# Altium PCB V-by-One.pcbdoc (part 2 of 2)
Units mil, origin at the board's own origin, x right, y up, seen from the top; angles counter-clockwise.
Board outline 3962.76 x 3236.76 mil, 2 copper layers (Top Layer, Bottom Layer); 214 components, 135 nets, 733 pads, 287 vias.
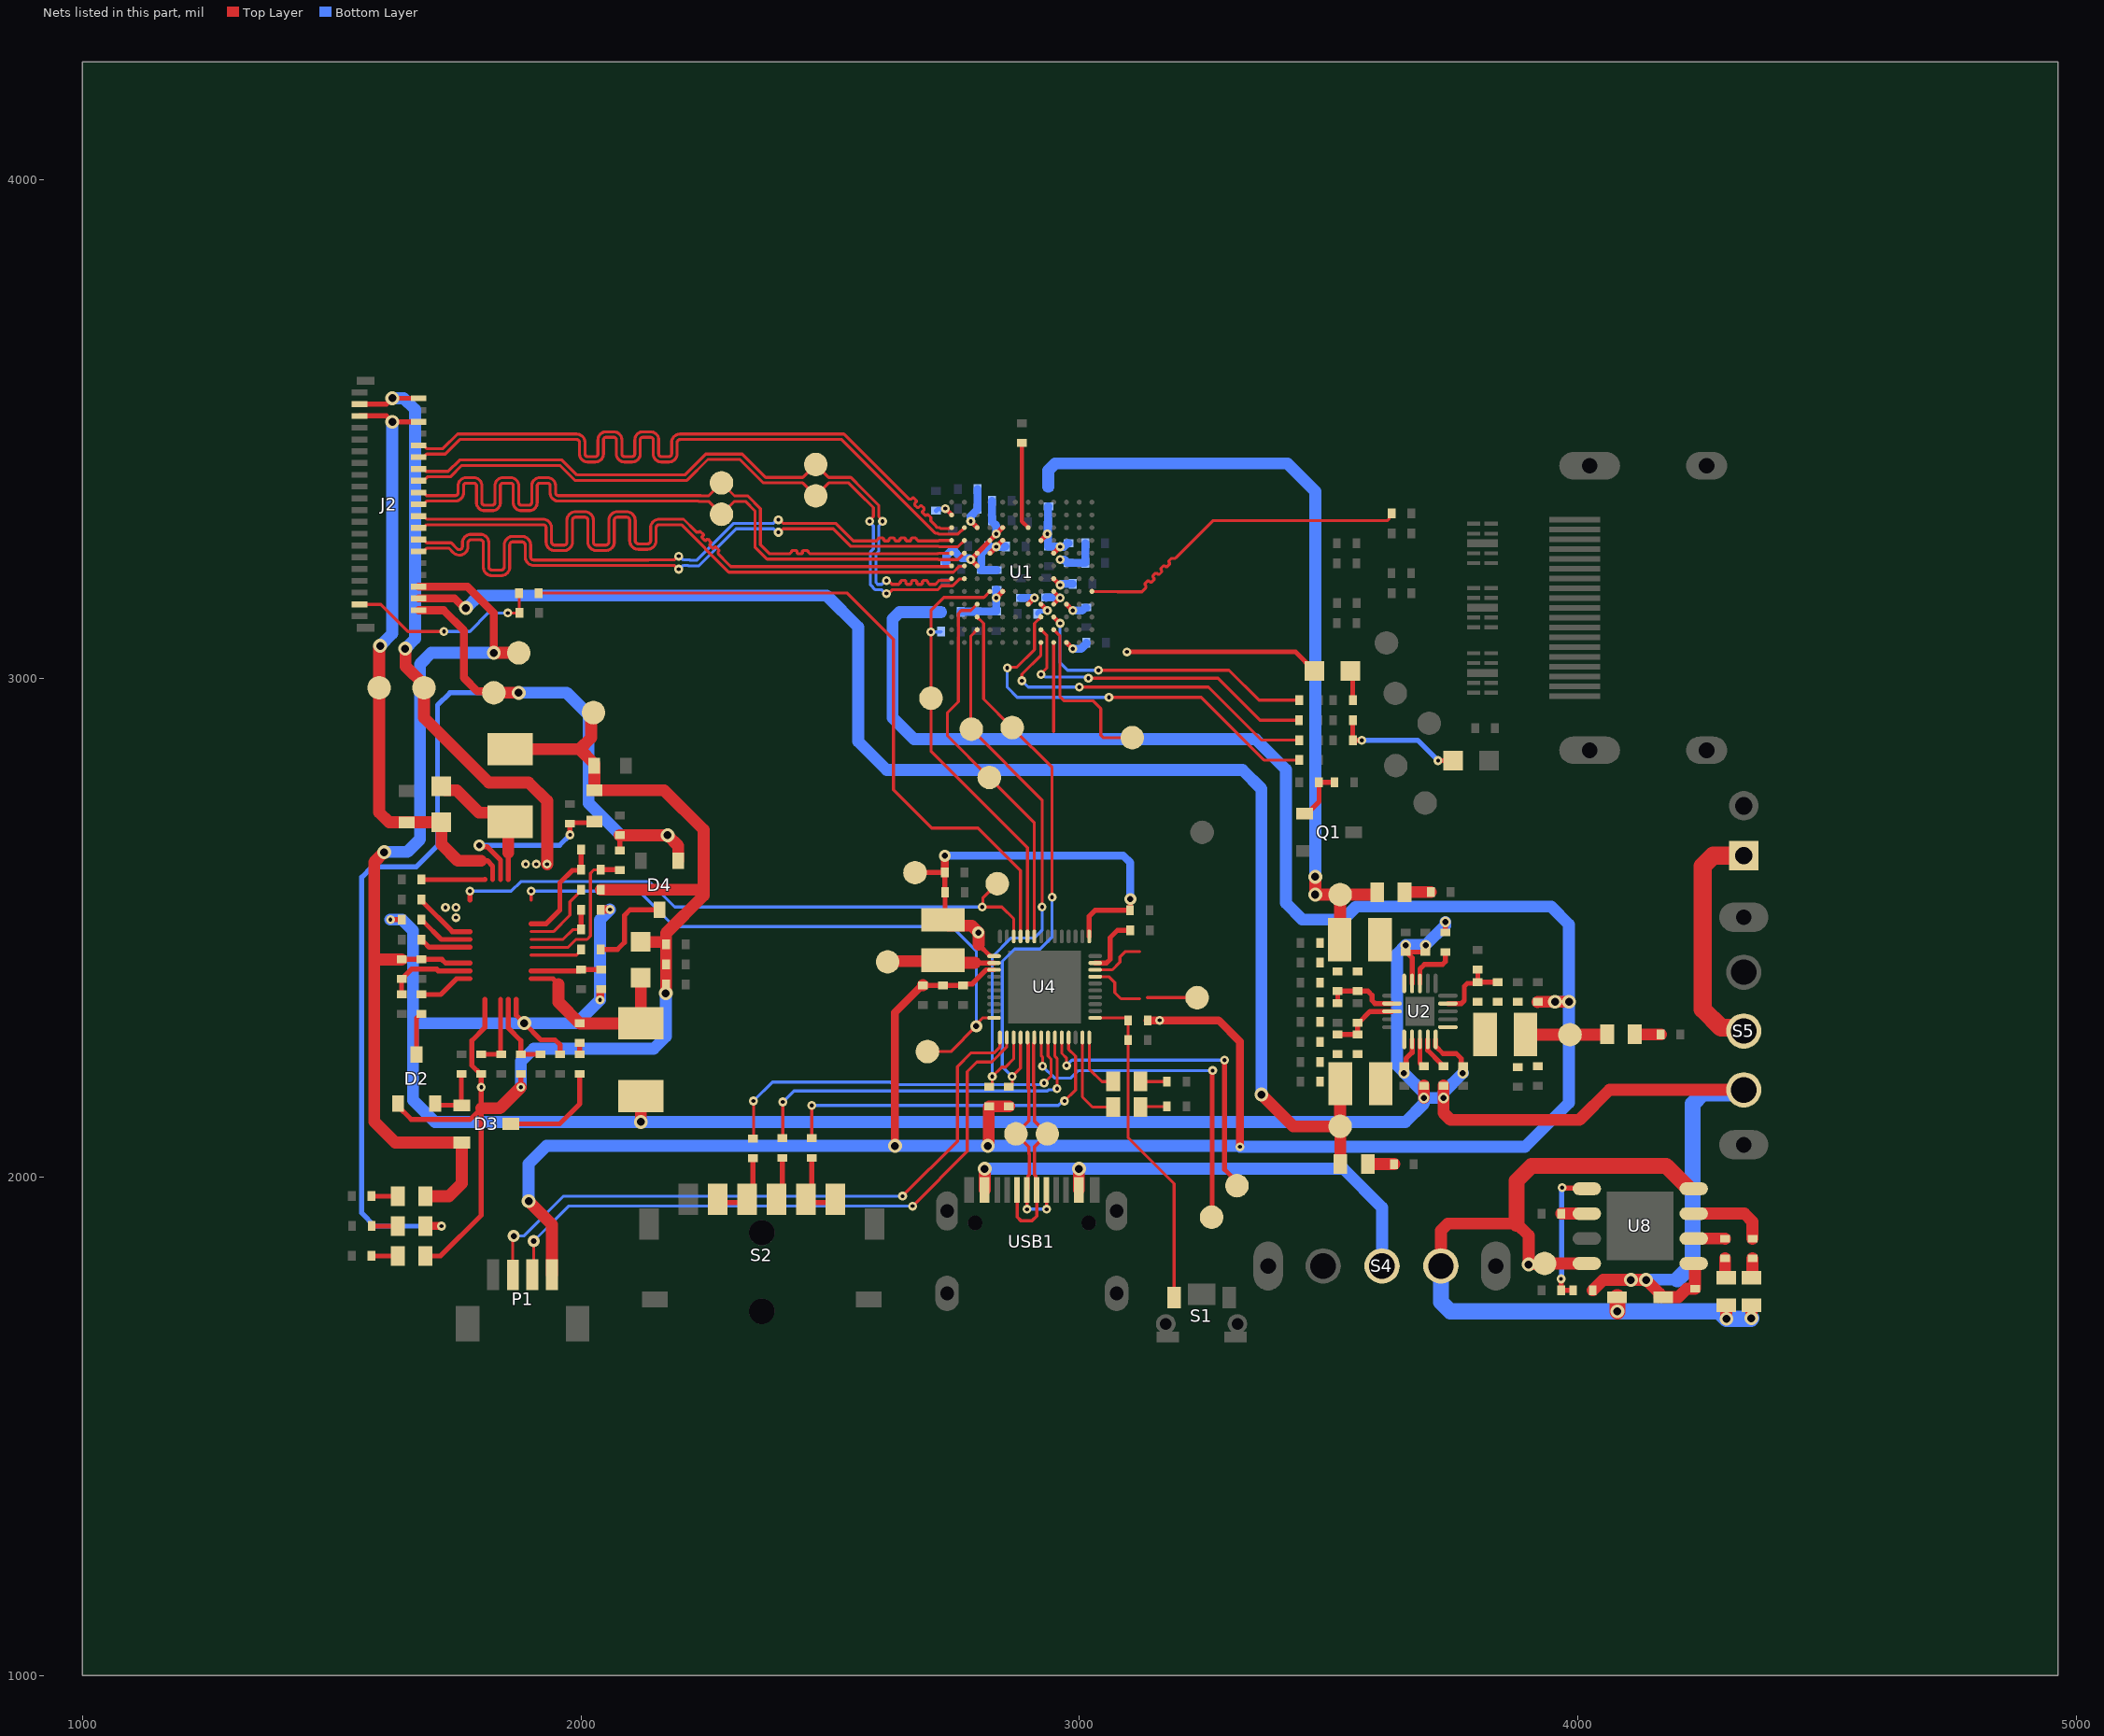
[diagram p2: the nets of this part, all layers, seen from the top]

## Via types
v1: diameter 18, hole 8, Top Layer to Bottom Layer, tented both sides, 186 vias
v2: diameter 28, hole 16, Top Layer to Bottom Layer, tented both sides, 33 vias
v3: diameter 22, hole 12, Top Layer to Bottom Layer, tented both sides, 29 vias
v4: diameter 19.68, hole 7.87, Top Layer to Bottom Layer, tented both sides, 26 vias
v5: diameter 24, hole 12, Top Layer to Bottom Layer, tented both sides, 12 vias
v6: diameter 20, hole 12, Top Layer to Bottom Layer, tented both sides, 1 vias

## Nets (pads, with @x,y where several pads share a name; then routed paths per layer and width w, separated by ;. In a path a pad name is that pad's centre, name@x,y a point inside that pad or via, vN(x,y) a via of type N, cw(c..) or ccw(c..) an arc to the next point about the centre after c; other vN are vias at no path point) (continued)
HR_D2_P: R44.1 U1.H12 | length 701.7
  Top Layer w5.97: U1.H12@3025,3174.61 3075.45,3174.61 3076.37,3173.69 3125,3173.69 3130.84,3179.54 3132.95,3181.65 3132.95,3186.59 3131.8,3187.74 3131.8,3190.84 3136.46,3195.5 3139.56,3195.5 3141.63,3193.43 3144.73,3193.43 3149.39,3198.08 3149.39,3201.19 3147.32,3203.26 3147.32,3206.36 3151.97,3211.01 3155.07,3211.01 3157.14,3208.94 3160.25,3208.94 3164.9,3213.6 3164.9,3216.7 3163.53,3218.07 3163.53,3221.17 3168.18,3225.83 3171.29,3225.83 3172.66,3224.46 3175.76,3224.46 3180.41,3229.11 3180.41,3232.21 3179.49,3233.14 3179.49,3236.24 3184.15,3240.89 3187.25,3240.89 3192.2,3240.89 3194.41,3243.1 3268.17,3316.86 3617.8,3316.86 3621.29,3320.36 3621.29,3326.49 R44.1@3626.18,3331.38
LCD_1V8: C2.2 C62.2 C63.2 C64.2 C65.2 D9.1 J2.36 L2.2 R6.1 TP2.1 | length 2963.4
  Top Layer w16: J2.36@1674.1,3160.47 1746.66,3160.47 1765.75,3141.38 v2(1769,3141.38)
  Top Layer w24: v2(3365,2165.38) 3429,2101.38 TP2.1@3523,2101.38 ; L2.2@3523.19,2186.92 3523.09,2186.82 3523.09,2101.47 TP2.1@3523,2101.38 ; D9.1@3523.44,2025.88 3523.22,2026.1 3523.22,2101.16 TP2.1@3523,2101.38
  Bottom Layer w24: v2(1769,3141.38) 1770.08,3141.38 1795.08,3166.38 2493,3166.38 2556,3103.38 2556,2873.38 2613,2816.38 3327,2816.38 3365,2778.38 3365,2393.38 v2(3365,2165.38)
LCD_BL+: C19.2 D5.2 J2.5 J2.6 TP8.1 | length 1241.7
  Top Layer w10: J2.5@1555.89,3526.7 1609.52,3526.7 v2(1621.42,3514.8) J2.6@1674.13,3514.8 ; 1799,2634.38 1812,2634.38 1822.76,2623.62 1822.76,2596.53
  Top Layer w24: v2(1597,3065.38) 1597,3064.3 1595,3062.3 1595,2731.38 1615,2711.38 C19.2@1650,2711.38 D5.2@1720,2711.38 1720,2667.38 1753,2634.38 1799,2634.38
  Bottom Layer w24: v2@1597.77,3066.14 1621.42,3089.8 v2(1621.42,3514.8)
LCD_BL-: J2.2 J2.3 TP7.1 | length 1263.4
  Top Layer w10: J2.3@1555.83,3550.32 1609.55,3550.32 v2(1621.41,3562.18) J2.2@1674.21,3562.18
  Top Layer w24: v2(1647.21,3059.67) 1647.97,3058.9 1647.97,3024.69 1685,2987.67 1685,2921.38 1815,2791.38 1895,2791.38 1932,2754.38 v1(1932,2627.38)
  Bottom Layer w24: v2(1621.41,3562.18) 1644.2,3562.18 1667,3539.38 1667,3079.46 v2(1647.21,3059.67)
  other v1: 1749,2520.38 1728,2540.38 1749,2540.38 1889,2627.38 1910,2627.38
LCD_EN: TP10.1 U4.10 | length 1276
  Top Layer w6: 1899.53,2555.2 1900,2555.67 v1(1900,2573.38) ; TP10.1@2695,2251.38 2742,2251.38 v5(2793,2302.38) 2793,2306.21 2805.84,2319.05 U4.10@2828.62,2319.06
  Bottom Layer w6: v1(1900,2573.38) 2116,2573.38 2187,2502.38 2744,2502.38 2793,2453.38 v5(2793,2302.38)
LCD_PWM: TP9.1 U4.46 | length 1243
  Top Layer w6: TP9.1@2835,2588.38 2806,2559.38 2806,2542.38 v1(2805,2541.38) 2844.48,2541.38 2867.99,2517.86 U4.46@2867.99,2482.44
  Top Layer w10: v1(1777,2573.38) 1777.24,2573.14 1777.24,2555.44 1777.48,2555.2
  Bottom Layer w6: v1(1777,2573.38) 1860,2573.38 1879,2592.38 2137,2592.38 2188,2541.38 v1(2805,2541.38)
LCD_RST: R9.2 U4.45 | length 1506.2
  Top Layer w6: R9.2@1915.23,3171.38 2325,3171.38 2534,3171.38 2627,3078.38 2627,2869.38 2627,2776.38 2703.45,2699.92 2796.45,2699.92 2881.77,2614.61 U4.45@2881.77,2482.44
LCD_VSN: C11.2 D4.1 D12.2 J2.38 R16.1 TP6.1 | length 2543.6
  Top Layer w10: R16.1@2077.63,2654.89 C11.2@2077.63,2685.52
  Top Layer w16: J2.38@1674.1,3136.83 1724.55,3136.83 1765,3096.38 1765,3001.38 1792.33,2974.05 1822.33,2974.05 TP6.1@1825,2971.38 ; D12.2@1687.56,1901.38 v1(1720,1901.38)
  Top Layer w24: TP6.1@1825,2971.38 v2(1875,2971.38) ; C11.2@2077.63,2685.52 v2(2173.86,2685.52) 2195.04,2664.34 D4.1@2195.04,2634.41
  Bottom Layer w10: v1(1720,1901.38) 1586,1901.38 1560,1927.38 1560,2601.38 1581,2622.38 1670,2622.38 1712,2664.38 1712,2946.38 1737,2971.38 v2(1875,2971.38)
  Bottom Layer w24: v2(1875,2971.38) 1971,2971.38 2015,2927.38 2015,2750.12 2079.61,2685.51 v2(2173.86,2685.52)
LCD_VSP: C14.2 D3.2 D11.1 J2.34 R18.1 TP5.1 | length 1999.2
  Top Layer w10: R18.1@1640,2436.38 C14.2@1680,2436.38 1720.77,2436.38 1727.93,2429.21 1777.48,2429.21
  Top Layer w16: J2.34@1674.09,3184.07 1772.31,3184.07 1825,3131.38 v2(1825,3051.38)
  Top Layer w24: v2(1605,2651.38) 1585,2631.38 1585,2431.38 ; R18.1@1640,2436.38 1590,2436.38 1585,2431.38 ; D11.1@1687.56,1961.38 1735,1961.38 1760.79,1987.16 D3.2@1760.78,2068.98 1627.4,2068.98 1585,2111.38 1585,2431.38 ; v2(1825,3051.38) TP5.1@1875,3051.38
  Bottom Layer w24: v2(1605,2651.38) 1605.77,2652.14 1651.77,2652.14 1677,2677.38 1677,3028.8 1699.57,3051.38 v2(1825,3051.38)
LED1: D14.1 U4.24 | length 121.3
  Top Layer w6: U4.24@3019.56,2279.69 3019.57,2216.81 3045,2191.38 D14.1@3067.44,2191.38
LED2: D15.1 U4.23 | length 189.2
  Top Layer w6: U4.23@3005.78,2279.69 3005.79,2160.59 3026.19,2140.19 D15.1@3067.44,2140.19
MCU_SWCLK: P1.3 U4.11 | length 1317.3
  Top Layer w6: P1.3@1863.04,1803.8 v5@1863.05,1881.38 ; v1(2645,1961.38) 2755,2071.38 2755,2221.38 2782.72,2249.09 2829.28,2249.09 2840.43,2260.25 U4.11@2840.43,2279.69
  Bottom Layer w6: v5(1865,1881.38) 1885,1881.38 1965,1961.38 v1(2645,1961.38)
MCU_SWDIO: P1.2 U4.12 | length 1291.9
  Top Layer w6: P1.2@1902.33,1803.86 1905,1806.52 v5(1905,1871.38) ; v1(2665,1941.38) 2775,2051.38 2775,2211.38 2794,2230.38 2824,2230.38 2853.85,2260.23 2853.85,2279.33 U4.12@2854.21,2279.69
  Bottom Layer w6: v5(1905,1871.38) 1975,1941.38 v1(2665,1941.38)
MIPI_CLK_N: J2.18 TP28.1 U1.E1 | length 1437.8
  Top Layer w5.97: J2.18@1674.09,3373.05 1683.94,3373.05 1690.26,3366.73 1738.87,3366.73 1747.34,3366.73 ccw(c1747.34,3372.7) 1753.31,3372.7 1753.31,3386.66 cw(c1769.47,3386.66) 1769.47,3402.82 1785.05,3402.82 cw(c1785.05,3386.66) 1801.22,3386.66 1801.22,3352.86 ccw(c1806.41,3352.86) 1806.41,3347.67 1821.99,3347.67 ccw(c1821.99,3352.86) 1827.19,3352.86 1827.19,3386.66 cw(c1843.35,3386.66) 1843.35,3402.82 1858.93,3402.82 cw(c1858.93,3386.66) 1875.1,3386.66 1875.1,3352.86 ccw(c1880.29,3352.86) 1880.29,3347.67 1895.87,3347.67 ccw(c1895.87,3352.86) 1901.07,3352.86 1901.07,3386.66 cw(c1917.23,3386.66) 1917.23,3402.82 1932.81,3402.82 cw(c1932.81,3386.66) 1948.98,3386.66 1948.98,3372.7 ccw(c1954.95,3372.7) 1954.95,3366.73 1981.44,3366.73 2240.03,3366.73 2240.39,3366.36 2255.85,3366.36 TP28.1@2281.86,3392.38 2307.88,3366.36 2334.41,3366.36 2359.84,3340.94 2359.84,3268.38 2377.75,3250.47 2415.87,3250.47 2418.85,3250.47 2422.35,3253.96 2422.35,3255.37 2423.45,3256.47 2432.22,3256.47 2433.32,3255.37 2433.32,3251.56 2434.42,3250.47 2443.19,3250.47 2444.29,3251.56 2444.29,3255.37 2445.39,3256.47 2454.16,3256.47 2455.26,3255.37 2455.26,3253.96 2458.76,3250.47 2481.53,3250.47 2716.02,3250.47 2716.93,3251.38 U1.E1@2743.5,3251.38
MIPI_CLK_P: J2.20 TP29.1 U1.E2 | length 1438.4
  Top Layer w5.97: J2.20@1687.08,3352.54 1690.29,3355.76 1738.87,3355.76 1747.34,3355.76 ccw(c1747.34,3372.7) 1764.28,3372.7 1764.28,3386.66 cw(c1769.47,3386.66) 1769.47,3391.85 1785.05,3391.85 cw(c1785.05,3386.66) 1790.25,3386.66 1790.25,3352.86 ccw(c1806.41,3352.86) 1806.41,3336.7 1821.99,3336.7 ccw(c1821.99,3352.86) 1838.16,3352.86 1838.16,3386.66 cw(c1843.35,3386.66) 1843.35,3391.85 1858.93,3391.85 cw(c1858.93,3386.66) 1864.13,3386.66 1864.13,3352.86 ccw(c1880.29,3352.86) 1880.29,3336.7 1895.87,3336.7 ccw(c1895.87,3352.86) 1912.04,3352.86 1912.04,3386.66 cw(c1917.23,3386.66) 1917.23,3391.85 1932.81,3391.85 cw(c1932.81,3386.66) 1938.01,3386.66 1938.01,3372.7 ccw(c1954.95,3372.7) 1954.95,3355.76 1981.44,3355.76 2235.49,3355.76 2235.85,3355.39 2255.85,3355.39 TP29.1@2281.86,3329.38 2307.88,3355.39 2329.87,3355.39 2348.87,3336.39 2348.87,3263.83 2373.2,3239.49 2716.02,3239.49 2716.93,3238.58 2756.3,3238.58 U1.E2@2769.09,3251.38
MIPI_D0_N: J2.14 TP30.1 U1.G1 | length 1388.8
  Top Layer w5.97: J2.14@1674.19,3420.33 1684.04,3420.33 1688.81,3415.55 1733.53,3415.55 1756.35,3438.38 1962,3438.38 1992,3408.38 2208,3408.38 2249.97,3450.35 2323.54,3450.35 2370.53,3403.36 2444.85,3403.36 TP30.1@2470.86,3429.38 2496.88,3403.36 2541.39,3403.36 2564.62,3380.14 2597.35,3347.41 2597.35,3324.89 2604.87,3317.38 v1(2604.86,3315.38) ; v1(2613,3196.38) 2616.26,3196.38 2623.77,3188.86 2629.38,3188.86 2634.38,3188.87 2637.37,3188.87 2640.86,3192.37 2640.86,3194.89 2642.51,3196.54 2650.19,3196.54 2651.83,3194.89 2651.83,3190.51 2653.48,3188.86 2661.16,3188.86 2662.8,3190.51 2662.8,3194.91 2664.45,3196.56 2672.13,3196.56 2673.77,3194.91 2673.77,3190.51 2675.42,3188.86 2683.1,3188.86 2684.74,3190.51 2684.74,3194.93 2686.39,3196.58 2694.07,3196.58 2695.71,3194.93 2695.71,3192.42 2699.21,3188.93 2710.87,3188.94 2715.87,3193.93 2718.91,3196.98 2739.24,3196.98 2742.46,3200.2 U1.G1@2743.5,3200.2
  Bottom Layer w5.97: v1(2604.86,3315.38) 2604.87,3313.38 2597.35,3305.87 2597.35,3255.4 2591.63,3249.68 2591.63,3192.36 2595.12,3188.86 2603.49,3188.86 2611,3196.38 v1(2613,3196.38)
MIPI_D0_P: J2.16 TP31.1 U1.G2 | length 1388
  Top Layer w5.97: J2.16@1674.1,3396.69 1683.95,3396.69 1691.85,3404.58 1738.07,3404.58 1760.9,3427.41 1957.46,3427.41 1987.46,3397.41 2195.63,3397.41 2212.54,3397.41 2254.51,3439.38 2319,3439.38 2365.98,3392.39 2444.85,3392.39 TP31.1@2470.86,3366.38 2496.88,3392.39 2536.85,3392.39 2546.18,3383.06 2556.87,3372.38 2586.38,3342.86 2586.38,3324.89 2578.87,3317.38 v1(2578.86,3315.38) ; v1(2613,3170.38) 2616.26,3170.38 2623.77,3177.89 2715.34,3177.89 2723.46,3186.01 2745.45,3186.01 2758.89,3199.46 2768.35,3199.46 U1.G2@2769.09,3200.2
  Bottom Layer w5.97: v1(2578.86,3315.38) 2578.87,3313.38 2586.38,3305.87 2586.38,3259.95 2580.66,3254.22 2580.66,3187.82 2590.58,3177.89 2603.49,3177.89 2611,3170.38 v1(2613,3170.38)
MIPI_D1_N: J2.22 U1.F1 | length 1446.3
  Top Layer w5.97: J2.22@1674.1,3325.8 1683.95,3325.8 1690.28,3319.47 1873.32,3319.47 1923.73,3319.47 cw(c1923.73,3302.31) 1940.9,3302.31 1940.9,3273.68 ccw(c1947.09,3273.68) 1947.09,3267.49 1965.67,3267.49 ccw(c1965.67,3273.68) 1971.87,3273.68 1971.87,3317.38 cw(c1989.03,3317.38) 1989.03,3334.54 2007.61,3334.54 cw(c2007.61,3317.38) 2024.78,3317.38 2024.78,3273.68 ccw(c2030.97,3273.68) 2030.97,3267.49 2049.55,3267.49 ccw(c2049.55,3273.68) 2055.75,3273.68 2055.75,3317.38 cw(c2072.91,3317.38) 2072.91,3334.54 2091.49,3334.54 cw(c2091.49,3317.38) 2108.66,3317.38 2108.66,3276.31 ccw(c2114.85,3276.31) 2114.85,3270.11 2133.43,3270.11 ccw(c2133.43,3276.31) 2139.63,3276.31 2139.63,3302.31 cw(c2156.79,3302.31) 2156.79,3319.47 2190.95,3319.47 2205.77,3319.47 2229.37,3295.88 2231.48,3293.77 2236.42,3293.77 2237.65,3295 2239.2,3295 2245.41,3288.79 2245.41,3287.24 2242.48,3284.31 2242.48,3282.76 2248.69,3276.56 2250.24,3276.56 2253.17,3279.48 2254.72,3279.48 2260.93,3273.28 2260.93,3271.73 2258,3268.8 2258,3267.25 2264.2,3261.04 2265.75,3261.04 2268.68,3263.97 2270.23,3263.97 2276.44,3257.76 2276.44,3256.21 2275.21,3254.98 2275.21,3250.04 2294.64,3230.61 2300.98,3224.27 2739.24,3224.27 2740.03,3225.05 2742.76,3225.05 U1.F1@2743.5,3225.79
MIPI_D1_P: J2.24 U1.F2 | length 1449
  Top Layer w5.97: J2.24@1674.09,3302.18 1683.94,3302.18 1690.26,3308.5 1873.32,3308.5 1923.73,3308.5 cw(c1923.73,3302.31) 1929.93,3302.31 1929.93,3273.68 ccw(c1947.09,3273.68) 1947.09,3256.52 1965.67,3256.52 ccw(c1965.67,3273.68) 1982.84,3273.68 1982.84,3317.38 cw(c1989.03,3317.38) 1989.03,3323.57 2007.61,3323.57 cw(c2007.61,3317.38) 2013.81,3317.38 2013.81,3273.68 ccw(c2030.97,3273.68) 2030.97,3256.52 2049.55,3256.52 ccw(c2049.55,3273.68) 2066.72,3273.68 2066.72,3317.38 cw(c2072.91,3317.38) 2072.91,3323.57 2091.49,3323.57 cw(c2091.49,3317.38) 2097.69,3317.38 2097.69,3276.31 ccw(c2114.85,3276.31) 2114.85,3259.14 2133.43,3259.14 ccw(c2133.43,3276.31) 2150.6,3276.31 2150.6,3302.31 cw(c2156.79,3302.31) 2156.79,3308.5 2190.95,3308.5 2201.23,3308.5 2296.43,3213.3 2747.14,3213.3 2758.89,3225.05 2768.35,3225.05 U1.F2@2769.09,3225.79
MIPI_D2_N: J2.26 U1.D1 | length 1344
  Top Layer w5.97: J2.26@1674.09,3278.56 1683.94,3278.56 1690.26,3272.23 1735.76,3272.23 1739.47,3272.23 1751.53,3260.17 ccw(c1755.91,3264.55) 1762.1,3264.55 1762.1,3272.05 cw(c1779.26,3272.06) 1779.26,3289.22 1797.85,3289.22 cw(c1797.85,3272.06) 1815.01,3272.06 1815.01,3223.6 ccw(c1821.2,3223.6) 1821.2,3217.41 1839.79,3217.41 ccw(c1839.79,3223.6) 1845.98,3223.6 1845.98,3267.96 cw(c1863.14,3267.96) 1863.14,3285.13 1881.73,3285.13 cw(c1881.73,3267.96) 1898.89,3267.96 1898.89,3243.88 ccw(c1905.08,3243.88) 1905.08,3237.68 1959.2,3237.68 2135.17,3237.68 2135.35,3237.86 2186.49,3237.86 2194,3245.38 v1(2196,3245.38) ; v1(2395.86,3318.38) 2398.36,3318.38 2405.38,3311.36 2510.61,3311.36 2545.92,3276.06 2589.71,3276.06 2592.7,3276.06 2596.2,3279.55 2596.2,3280.41 2597.84,3282.06 2605.52,3282.06 2607.17,3280.41 2607.17,3277.7 2608.81,3276.06 2616.49,3276.06 2618.14,3277.7 2618.14,3280.41 2619.78,3282.06 2627.46,3282.06 2629.11,3280.41 2629.11,3277.7 2630.75,3276.06 2638.43,3276.06 2640.08,3277.7 2640.08,3280.41 2641.72,3282.06 2649.4,3282.06 2651.05,3280.41 2651.05,3277.7 2652.69,3276.06 2660.37,3276.06 2662.02,3277.7 2662.02,3280.41 2663.66,3282.06 2671.34,3282.06 2672.99,3280.41 2672.99,3279.55 2676.48,3276.06 2696.5,3276.06 2717,3276.06 2717.91,3276.97 U1.D1@2743.5,3276.97
  Bottom Layer w5.97: v1(2196,3245.38) 2198,3245.38 2205.51,3237.86 2218.42,3237.86 2219.42,3236.86 2231.84,3236.86 2306.34,3311.36 2386.35,3311.36 2393.37,3318.38 v1(2395.86,3318.38)
MIPI_D2_P: J2.28 U1.D2 | length 1344
  Top Layer w5.97: J2.28@1674.09,3254.94 1683.94,3254.94 1690.26,3261.26 1734.92,3261.26 1735.76,3260.43 1743.77,3252.42 ccw(c1755.91,3264.55) 1773.07,3264.55 1773.07,3272.05 cw(c1779.26,3272.06) 1779.26,3278.25 1797.85,3278.25 cw(c1797.85,3272.06) 1804.04,3272.06 1804.04,3223.6 ccw(c1821.2,3223.6) 1821.2,3206.44 1839.79,3206.44 ccw(c1839.79,3223.6) 1856.95,3223.6 1856.95,3267.96 cw(c1863.14,3267.96) 1863.14,3274.16 1881.73,3274.16 cw(c1881.73,3267.96) 1887.92,3267.96 1887.92,3243.88 ccw(c1905.08,3243.88) 1905.08,3226.71 1959.2,3226.71 2139.71,3226.71 2139.89,3226.89 2186.49,3226.89 2194,3219.38 v1(2196,3219.38) ; v1(2395.86,3293.38) 2398.36,3293.38 2405.38,3300.39 2506.07,3300.39 2541.37,3265.09 2717,3265.09 2717.91,3264.17 2756.3,3264.17 U1.D2@2769.09,3276.97
  Bottom Layer w5.97: v1(2196,3219.38) 2198,3219.38 2205.51,3226.89 2213.88,3226.89 2214.88,3225.89 2236.38,3225.89 2310.88,3300.39 2386.35,3300.39 2393.37,3293.38 v1(2395.86,3293.38)
MIPI_D3_N: J2.10 U1.C1 | length 1427.2
  Top Layer w5.97: J2.10@1674.18,3467.56 1684.03,3467.56 1690.37,3461.22 1723.2,3461.22 1752.35,3490.38 1969.58,3490.38 1991.08,3490.38 cw(c1991.08,3473.44) 2008.02,3473.44 2008.02,3450.42 ccw(c2013.21,3450.42) 2013.21,3445.22 2028.79,3445.22 ccw(c2028.79,3450.42) 2033.99,3450.42 2033.99,3478.74 cw(c2050.15,3478.74) 2050.15,3494.9 2065.73,3494.9 cw(c2065.73,3478.74) 2081.9,3478.74 2081.9,3450.42 ccw(c2087.09,3450.42) 2087.09,3445.22 2102.67,3445.22 ccw(c2102.67,3450.42) 2107.87,3450.42 2107.87,3478.74 cw(c2124.03,3478.74) 2124.03,3494.9 2139.61,3494.9 cw(c2139.61,3478.74) 2155.78,3478.74 2155.78,3450.42 ccw(c2160.97,3450.42) 2160.97,3445.22 2176.55,3445.22 ccw(c2176.55,3450.42) 2181.75,3450.42 2181.75,3473.44 cw(c2198.69,3473.44) 2198.69,3490.38 2207.16,3490.38 2527.28,3490.38 2655.79,3361.87 2657.9,3359.76 2662.85,3359.76 2665.24,3362.16 2667.57,3362.16 2673,3356.73 2673,3354.41 2669.29,3350.7 2669.29,3348.37 2674.72,3342.94 2677.05,3342.94 2680.71,3346.6 2683.04,3346.6 2688.47,3341.17 2688.47,3338.85 2684.81,3335.18 2684.81,3332.86 2690.24,3327.43 2692.57,3327.43 2693.88,3328.74 2696.2,3328.74 2701.63,3323.31 2701.63,3320.98 2701.63,3316.03 2708.99,3308.68 2715.1,3302.56 2719.65,3302.56 2721.47,3300.73 2738.94,3300.73 2740.03,3301.82 2742.76,3301.82 U1.C1@2743.5,3302.56
MIPI_D3_P: J2.12 U1.C2 | length 1426.8
  Top Layer w5.97: J2.12@1674.15,3443.93 1684,3443.93 1690.32,3450.25 1727.74,3450.25 1756.9,3479.41 1969.58,3479.41 1991.08,3479.41 cw(c1991.08,3473.44) 1997.05,3473.44 1997.05,3450.42 ccw(c2013.21,3450.42) 2013.21,3434.25 2028.79,3434.25 ccw(c2028.79,3450.42) 2044.96,3450.42 2044.96,3478.74 cw(c2050.15,3478.74) 2050.15,3483.93 2065.73,3483.93 cw(c2065.73,3478.74) 2070.93,3478.74 2070.93,3450.42 ccw(c2087.09,3450.42) 2087.09,3434.25 2102.67,3434.25 ccw(c2102.67,3450.42) 2118.84,3450.42 2118.84,3478.74 cw(c2124.03,3478.74) 2124.03,3483.93 2139.61,3483.93 cw(c2139.61,3478.74) 2144.81,3478.74 2144.81,3450.42 ccw(c2160.97,3450.42) 2160.97,3434.25 2176.55,3434.25 ccw(c2176.55,3450.42) 2192.72,3450.42 2192.72,3473.44 cw(c2198.69,3473.44) 2198.69,3479.41 2207.16,3479.41 2522.74,3479.41 2710.56,3291.59 2715.1,3291.59 2716.93,3289.76 2756.3,3289.76 U1.C2@2769.09,3302.56
NETBT1_1: BT1.1 S5.2 | length 479.2
  Top Layer w36: S5.2@4332.63,2292.72 4325.97,2299.39 4286.99,2299.39 4250,2336.38 4250,2623.52 4271.09,2644.61 BT1.1@4332.63,2644.61
NETC1_1: C1.1 R1.2 R2.1 U2.14 | length 160.3
  Top Layer w10: U2.14@3739.08,2347.77 3766.14,2347.76 3772,2353.62 3772,2382.38 3778,2388.38 3796,2388.38 C1.1@3799,2391.38 ; R2.1@3800,2416.38 3799.13,2415.51 C1.1@3799.13,2390.48 3837.09,2390.47 R1.2@3838,2391.38
NETC2_1: C2.1 R6.2 R7.1 U2.3 | length 142.1
  Top Layer w10: R6.2@3518.06,2285.79 3518.22,2285.63 3557.9,2285.63 C2.1@3558.06,2285.48 R7.1@3558.06,2309.23 3560.03,2309.23 3582.81,2332.01 U2.3@3626.88,2332.02
NETC3_1: C3.1 R8.2 R11.1 U2.2 | length 149.2
  Top Layer w10: R11.1@3518.06,2348.92 C3.1@3518.06,2372.68 R8.2@3558.06,2372.68 3578.7,2372.67 3587,2364.38 3587,2353.62 3592.86,2347.76 U2.2@3626.88,2347.77
NETC8_1: C8.1 R14.2 | length 141.5
  Top Layer w10: 1899.53,2413.46 1997.4,2413.46 C8.1@2000,2416.07 R14.2@2040,2416.07
NETC9_1: C9.1 D3.3 | length 214.9
  Top Layer w10: D3.3@1859.21,2106.38 1957,2106.38 1997.52,2146.9 C9.1@1997.52,2206.7
NETC9_2: C9.2 R15.1 | length 22.6
  Top Layer w10: C9.2@1997.52,2246.07 R15.1@1997.52,2268.66
NETC10_1: C10.1 | length 110.6
  Top Layer w10: C10.1@1680,2366.07 1718.5,2366.06 1750.16,2397.72 1777.48,2397.72
NETC10_2: C10.2 D2.3 | length 86.4
  Top Layer w10: D2.3@1670,2245.59 1670,2318.66 1678.03,2326.69 C10.2@1680,2326.7
NETC12_2: C12.2 R17.2 | length 217.9
  Top Layer w10: 1899.53,2507.95 1930.39,2507.95 1957.64,2535.2 1957.64,2590.2 1982.64,2615.2 1999.13,2615.2 R17.2@2000.31,2616.38 C12.2@2000.31,2656.38
NETC13_2: C13.2 D2.2 D3.1 | length 118
  Top Layer w10: D2.2@1707.4,2147.17 1710.79,2143.78 D3.1@1760.78,2143.78 1760,2144.57 C13.2@1760,2206.7
NETC15_1: C15.1 D4.3 | length 182.7
  Top Layer w10: C15.1@2039.68,2456.38 2073,2456.38 2087,2470.38 2087,2524.56 2098.43,2535.98 D4.3@2157.63,2535.99
NETC15_2: C15.2 | length 106.7
  Top Layer w6: 1899.53,2444.96 1990.87,2444.96 2000.32,2454.41 C15.2@2000.31,2456.38
NETC16_2: C16.2 | length 125.5
  Top Layer w10: C16.2@1679.68,2556.38 1679.68,2554.41 1682.56,2551.53 1741.89,2492.2 1777.48,2492.2
NETC17_2: C17.2 R28.1 | length 357.9
  Top Layer w10: v5(1796,2665.38) 1798.68,2662.7 1811.5,2662.7 1838.5,2635.7 1838.5,2596.53 ; v1(1978,2686.38) 1977.82,2686.56 1977.82,2708.61 C17.2@1977.63,2708.79 1979.61,2710.76 2024.76,2710.76 R28.1@2026.73,2712.73
  Bottom Layer w10: v5(1796,2665.38) 1957,2665.38 v1(1978,2686.38)
NETC20_1: C20.1 U4.33 | length 123.1
  Top Layer w10: U4.33@3031.38,2429.3 3054.55,2429.29 3061.42,2436.16 3061.42,2480.16 3075.98,2494.72 C20.1@3101.61,2494.73
NETD5_1: D5.1 L5.2 | length 283.4
  Top Layer w10: 1854,2650.38 1854,2596.79 1854.25,2596.53
  Top Layer w24: D5.1@1720,2783.38 1727.68,2775.69 1750.68,2775.69 1795.49,2730.89 1839.12,2730.89 L5.2@1857.63,2712.37 ; 1854,2650.38 1854,2711.38 L5.2@1854.99,2712.37
NETD6_2: D6.2 R31.1 R32.1 | length 258.2
  Top Layer w10: R32.1@3548.19,2916.38 R31.1@3548.19,2876.38 3548.28,2876.29 3566.41,2876.29 v1(3566.5,2876.2) ; v1(3719.37,2835.2) D6.2@3749.37,2835.2
  Bottom Layer w10: v1(3566.5,2876.2) 3678.38,2876.2 v1(3719.37,2835.2)
NETD7_2: D7.2 R33.1 | length 60.8
  Top Layer w10: D7.2@3543.5,3015.2 3548.19,3010.51 R33.1@3548.19,2956.38
NETD8_2: D8.2 R52.1 | length 52.4
  Top Layer w24: D8.2@4113.7,2285.88 R52.1@4166.14,2285.88
NETD9_2: D9.2 R53.1 | length 52.8
  Top Layer w24: D9.2@3578.56,2025.88 R53.1@3631.31,2025.88
NETD10_2: D10.2 R54.1 | length 52.8
  Top Layer w24: D10.2@3652.24,2571.38 R54.1@3705,2571.38
NETD11_2: D11.2 R55.1 | length 52.8
  Top Layer w10: R55.1@1579.68,1961.38 D11.2@1632.44,1961.38
NETD12_1: D12.1 R56.1 | length 52.4
  Top Layer w10: R56.1@1580,1901.38 D12.1@1632.44,1901.38
NETD13_2: D13.2 R57.1 | length 52.8
  Top Layer w10: R57.1@1579.68,1841.38 D13.2@1632.44,1841.38
NETD14_2: D14.2 R61.1 | length 52.8
  Top Layer w6: D14.2@3122.56,2191.38 R61.1@3175.31,2191.38
NETD15_2: D15.2 R62.1 | length 53.2
  Top Layer w6: D15.2@3122.56,2140.19 3123.75,2141.38 R62.1@3175.31,2141.38
NETD17_2: D17.2 R64.1 | length 39.5
  Top Layer w24: D17.2@4348.44,1797.85 4350,1799.4 R64.1@4350,1836.7
NETD18_2: D18.2 R65.1 | length 40.1
  Top Layer w24: R65.1@4295,1836.7 4295,1799.62 4296.78,1797.85 D18.2@4297.25,1797.85
NETJ2_37: J2.37 R9.1 R10.2 | length 398.3
  Top Layer w6: J2.37@1555.89,3148.75 1598.63,3148.75 1653,3094.38 v1(1725,3094.38) ; v1(1853,3131.38) R10.2@1876.18,3131.38 1876.02,3131.53 1876.02,3171.22 R9.1@1875.86,3171.38
  Bottom Layer w6: v1(1725,3094.38) 1777,3094.38 1814,3131.38 v1(1853,3131.38)
NETL1_1: L1.1 U2.11
NETL2_1: L2.1 U2.6
NETL3_1: L3.1 U2.20
NETQ1_1: Q1.1 R35.2 R36.1 | length 108.4
  Top Layer w10: Q1.1@3451.65,2728.78 3456.57,2728.78 3480.55,2752.76 R36.1@3480.55,2791.38 R35.2@3511.49,2791.38
NETR3_2: R3.2 U2.9 | length 67.7
  Top Layer w10: U2.9@3698.73,2275.92 3698.73,2253.93 3725.37,2227.29 3725.37,2225.32 3728.24,2222.45 R3.2@3730.21,2222.45
NETR4_2: R4.2 U2.8 | length 57.9
  Top Layer w10: U2.8@3682.98,2275.92 3682.98,2228.33 3688.86,2222.45 R4.2@3690.83,2222.45
NETR5_2: R5.2 U2.18 | length 105.4
  Top Layer w10: U2.18@3682.98,2388.12 3682.98,2417.36 3692,2426.38 3728.28,2426.38 3734.13,2432.24 R5.2@3734.13,2451.11
NETR12_2: R12.2 R13.1 | length 160.1
  Top Layer w10: 1854.25,2356.38 1854.25,2298.58 1879.38,2273.45 R12.2@1879.38,2246.07 R13.1@1918.76,2246.07
NETR16_2: R16.2 R17.1 | length 317.6
  Top Layer w6: 1899.53,2460.71 1974.33,2460.71 1990,2476.38 2012,2476.38 2019,2483.38 2019,2609.38 2025.57,2615.95 R17.1@2040.12,2615.95
  Top Layer w10: R17.1@2040.12,2615.95 R17.1@2039.68,2616.38 2076.77,2616.38 R16.2@2077.63,2615.52
NETR18_2: R18.2 R19.1 | length 179.1
  Top Layer w10: R19.1@1640,2366.07 R18.2@1640,2397.01 1641.97,2397.01 1644.84,2399.88 1644.84,2401.85 1659.77,2416.78 1710.49,2416.78 1713.8,2413.46 1777.48,2413.46
NETR20_2: R20.2 | length 115.1
  Top Layer w10: R20.2@1679.93,2516.13 1679.93,2514.16 1682.56,2511.53 1684.53,2511.53 1719.61,2476.46 1777.48,2476.46
NETR21_1: R21.1 | length 105.1
  Top Layer w10: R21.1@1679.93,2476.13 1679.93,2474.16 1682.56,2471.53 1684.53,2471.53 1695.35,2460.71 1777.48,2460.71
NETR22_2: R22.2 R23.1 | length 150.9
  Top Layer w10: R22.2@1800,2246.07 R23.1@1840,2246.07 1838.5,2247.56 1838.5,2356.38
NETR24_2: R24.2 R26.1 | length 149
  Top Layer w6: 1899.53,2476.46 1963.9,2476.46 1983.3,2495.86 R26.1@1997.44,2495.86
  Top Layer w10: R26.1@1997.44,2495.86 1997.96,2496.38 R26.1@2000.31,2496.38 R24.2@2000.31,2536.38
NETR25_1: R25.1 | length 152.3
  Top Layer w6: 1899.53,2492.2 1944.65,2492.2 1977.64,2525.2 1977.64,2551.73 2000.32,2574.41 R25.1@2000.31,2576.38
NETR27_2: R27.2 | length 127.1
  Top Layer w10: R27.2@1680,2596.38 1680.08,2596.46 1806.93,2596.46 1807.01,2596.53
NETR34_1: R34.1 U1.B1 | length 38.1
  Top Layer w9: v1(2730.7,3340.95) U1.B1@2743.5,3328.15
  Bottom Layer w9: R34.1@2712.5,3336.52 2715.6,3339.61 2729.37,3339.61 v1(2730.7,3340.95)
NETR37_2: R37.2 U1.C7 | length 175.3
  Top Layer w8: R37.2@2884.25,3472.52 2884.25,3315.35 U1.C7@2897.04,3302.56
NETR46_1: R46.1 U1.M8 | length 698.4
  Top Layer w6: v1(2884.25,2995.48) 2884.58,2995.8 2884.58,3008.6 2922.64,3046.65 U1.M8@2922.63,3072.25 ; v1(2999.41,2982.68) 3258.61,2982.68 3364.91,2876.38 R46.1@3440.69,2876.38
  Bottom Layer w6: v1(2884.25,2995.48) 2897.05,2982.68 v1(2999.41,2982.68)
NETR47_1: R47.1 U1.L8 | length 655.3
  Top Layer w6: v1(2922.63,3008.27) 2922.64,3009.69 2934.65,3021.71 2934.65,3085.82 U1.L8@2922.63,3097.84 ; v1(3018,3000.38) 3277.91,3000.38 3361.91,2916.38 R47.1@3440.37,2916.38
  Bottom Layer w6: v1(2922.63,3008.27) 2925.89,3008.27 2931.48,3002.67 3015.7,3002.67 v1(3018,3000.38)
NETR48_2: R48.2 U1.J8 | length 41.9
  Top Layer w9: U1.J8@2922.63,3149.02 v1(2935.43,3136.22)
  Bottom Layer w9: R48.2@2915.19,3129.95 2915.19,3131.51 2918.56,3134.88 2934.09,3134.88 v1(2935.43,3136.22)
NETR49_1: R49.1 U1.K9 | length 608.1
  Top Layer w6: v1(3038,3016.38) 3299.91,3016.38 3359.91,2956.38 R49.1@3440.69,2956.38
  Top Layer w9: U1.K9@2948.23,3123.43 v1(2961.02,3110.63)
  Bottom Layer w6: v1(2961.02,3110.63) 2961.02,3031.35 2976,3016.38 v1(3038,3016.38)
NETR50_1: R50.1 U1.K8 | length 825.8
  Top Layer w6: v1(2855.04,3021.25) 2856.46,3022.65 2874.46,3022.65 2909.84,3058.04 2909.84,3110.63 U1.K8@2922.63,3123.43 ; v1(3059.04,2962.25) 3244.05,2962.24 3369.91,2836.38 R50.1@3440.69,2836.38
  Bottom Layer w6: v1(2855.04,3021.25) 2855.05,2982.24 2875.05,2962.24 v1(3059.04,2962.25)
NETR51_1: R51.1 U1.G9 | length 44.7
  Top Layer w9.84: U1.G9@2948.23,3200.2 v1(2961.02,3187.4)
  Bottom Layer w16: v1(2961.02,3187.4) 2962.98,3189.36 R51.1@2986.82,3189.36
NETR59_2: R59.2 S2.f S2.g | length 148.6
  Top Layer w10: R59.2@2463.15,2038.13 2463.15,1948.6 S2.g@2522.2,1948.6
NETR60_2: R60.2 S2.e | length 89.5
  Top Layer w10: S2.e@2404.09,1948.6 R60.2@2404.09,2038.13
NETR63_2: R63.2 R66.1 U8.1 | length 281.3
  Top Layer w10: v1(3966,1795.38) 3966.23,1795.15 3966.23,1772.66 R66.1@3966.46,1772.43 R63.2@3990.22,1772.43 ; v1(3968,1978.38) 3969,1977.38 4016.72,1977.38 U8.1@4017.71,1976.38
  Bottom Layer w10: v1(3966,1795.38) 3967,1796.38 3967,1977.38 v1(3968,1978.38)
NETR64_2: R64.2 U8.7 | length 158.6
  Top Layer w24: U8.7@4232.28,1926.38 4333.94,1926.38 4350,1910.32 R64.2@4350,1876.07
NETR65_2: R65.2 U8.6 | length 62.8
  Top Layer w24: U8.6@4232.28,1876.38 4294.69,1876.38 R65.2@4295,1876.07
NETR67_1: R67.1 U8.2 | length 51.3
  Top Layer w24: R67.1@3966.46,1926.38 U8.2@4017.71,1926.38
NETR68_2: R68.2 S2.c S2.d | length 148.3
  Top Layer w10: S2.c@2285.99,1948.6 2345.04,1948.6 R68.2@2345.04,2037.82
NETS4_2: S4.2 USB1.A4 USB1.A9 | length 1031.4
  Top Layer w24: USB1.A4@2809.9,1973.76 v2(2809.9,2016.29) ; USB1.A9@2998.88,1973.76 v2(2998.88,2016.26)
  Bottom Layer w24: v2(2809.9,2016.29) v2(2998.88,2016.26) ; v2(2998.88,2016.26) 3529.12,2016.26 3606.89,1938.49 S4.2@3606.89,1821.38
NETU1_M9: U1.M9 | length 179.1
  Top Layer w6: 2948.23,2893.11 U1.M9@2948.23,3072.25
NRST: C52.2 R58.2 S1.2 U4.25 | length 662.4
  Top Layer w6: U4.25@3031.38,2319.06 3092.76,2319.05 R58.2@3097.52,2314.3 C52.2@3097.52,2274.3 3097.52,2078.86 3189.88,1986.5 S1.2@3189.88,1758.29
RK628D_INTN: TP23.1 U1.J3 U4.43 | length 774.7
  Top Layer w6: U1.J3@2794.68,3149.02 2781.89,3136.22 2762.87,3136.22 2756.87,3130.22 2756.87,2953.24 2735,2931.38 2735,2885.38 TP23.1@2819,2801.38 2909,2711.38 2909,2534.75 2909.33,2534.42 U4.43@2909.33,2482.44
RK628D_RSTN: C45.1 TP22.1 U1.H4 U4.44 | length 886.8
  Top Layer w6: v1(2702,3093.38) TP22.1@2702,2960.38 2702,2854.38 2895.55,2660.83 U4.44@2895.55,2482.44 ; v1@2702,3095.28 2702,3136.51 2728.11,3162.62 2808.29,3162.62 U1.H4@2820.27,3174.61
  Bottom Layer w6: v1(2702,3093.38) 2721.57,3093.38 C45.1@2722.18,3094
RK628D_SCL: R30.2 TP24.1 U1.L3 U4.13 | length 1153.3
  Top Layer w6: TP24.1@2781.89,2898.38 2781.89,3085.04 U1.L3@2794.68,3097.84 ; TP24.1@2783,2898.38 2925,2756.38 v1(2925,2541.38) ; R30.2@2819.13,2181.07 2820.13,2181.06 2825,2185.94 v1(2825,2201.38) 2843.96,2220.34 2851.33,2220.34 2867.99,2237 U4.13@2867.99,2279.69
  Bottom Layer w6: v1(2825,2201.38) 2825,2441.38 2863,2479.38 2910,2479.38 2925,2494.38 v1(2925,2541.38)
RK628D_SDA: R29.2 TP25.1 U1.K3 U4.14 | length 1173.1
  Top Layer w6: U1.K3@2794.68,3123.43 2807.48,3110.63 2807.48,2958.9 TP25.1@2865,2901.38 2945,2821.38 v1(2945,2561.38) ; R29.2@2858.51,2181.07 2860.13,2181.06 2865,2185.94 v1(2865,2201.38) 2881.77,2218.15 U4.14@2881.77,2279.69
  Bottom Layer w6: v1(2865,2201.38) 2845,2221.38 2845,2432.38 2869.87,2457.25 2920.87,2457.25 2945,2481.38 2945,2532.38 v1(2945,2561.38)
RK628D_XTALO: TP26.1 U1.L9 | length 349.7
  Top Layer w6: U1.L9@2948.23,3097.84 2961.02,3085.04 2961.02,2963.27 2968.91,2955.38 3026.71,2955.38 3042.72,2939.37 3042.72,2893.11 3042.72,2886.25 3047.59,2881.38 TP26.1@3105.86,2881.38
RXD: TP32.1 U4.20 | length 644.2
  Top Layer w6: U4.20@2964.45,2279.68 2964.45,2247.93 2974,2238.38 v1(2974,2223.38)
  Top Layer w10: v1(3291,2234.38) 3291,2015.06 3316,1990.06 TP32.1@3316,1982.38
  Bottom Layer w6: v1(2974,2223.38) 2985,2234.38 v1(3291,2234.38)
SW: D1.1 L4.2 R15.2 | length 370
  Top Layer w10: 1899.53,2397.72 1943.66,2397.72 1955,2386.38
  Top Layer w24: 1955,2386.38 1955,2350.55 R15.2@1997.52,2308.03 L4.2@2120,2308.03 D1.1@2120,2399.38
SW1: R59.1 U4.21 | length 718.8
  Top Layer w6: v1(2463,2143.38) 2463,2077.65 R59.1@2463.15,2077.5 ; v1(2970,2152.38) 2992,2174.38 2992,2242.29 2978.23,2256.06 U4.21@2978.23,2279.69
  Bottom Layer w6: v1(2463,2143.38) 2957.75,2143.38 2966.75,2152.38 v1(2970,2152.38)
SW2: R60.1 U4.19 | length 738.5
  Top Layer w6: R60.1@2404.09,2077.5 2405,2078.4 v1(2405,2150.38) ; U4.19@2950.67,2279.69 2950.67,2242.01 2955,2237.68 v1(2955,2177.38)
  Bottom Layer w6: v1(2405,2150.38) 2427,2172.38 2935.63,2172.38 2938.33,2175.08 2952.7,2175.08 v1(2955,2177.38)
SW3: R68.1 U4.18 | length 777.3
  Top Layer w6: R68.1@2345.04,2077.19 2346,2078.14 v1(2346,2152.38) ; v1(2929,2188.38) 2943,2202.38 2943,2236.25 2936.89,2242.36 U4.18@2936.89,2279.69
  Bottom Layer w6: v1(2346,2152.38) 2384,2190.38 2620.44,2190.38 2625.44,2185.38 2922.75,2185.38 2925.75,2188.38 v1(2929,2188.38)
TXD: TP33.1 U4.17 | length 710.5
  Top Layer w6: U4.17@2923.11,2279.69 2923.11,2243.38 2926,2240.49 v1(2926,2222.38)
  Top Layer w10: TP33.1@3265,1919.38 3266,1920.38 3266,2212.38 v1(3267,2213.38)
  Bottom Layer w6: v1(2926,2222.38) 2950,2198.38 2983,2198.38 2998,2213.38 v1(3267,2213.38)
USBD_N: TP14.1 U4.16 USB1.A7 USB1.B7 | length 483.5
  Top Layer w6.71: USB1.B7@2874.86,1973.75 2874.86,1919.44 2881.93,1912.38 2905,1912.38 2914.23,1921.61 2914.23,1973.75 2912.08,1975.91 2912.08,2001.56 2909.75,2003.89 2909.75,2050.28 2909.33,2050.7 2909.33,2060.23 TP14.1@2935.47,2086.38 2909.33,2112.52 2909.33,2181.35 2907.8,2182.88 2907.8,2267.99 2909.33,2269.53 U4.16@2909.33,2279.69
USBD_P: TP15.1 U4.15 USB1.A6 USB1.B6 | length 447.5
  Top Layer w6.71: v1(2894.55,1935.16) USB1.A6@2894.55,1973.75 2896.71,1975.91 2896.71,2001.56 2899.04,2003.89 2899.04,2045.84 2898.62,2046.26 2898.62,2060.23 TP15.1@2872.47,2086.38 2898.62,2112.52 2898.62,2176.91 2897.09,2178.44 2897.09,2267.99 2895.55,2269.53 U4.15@2895.55,2279.69 ; v1(2933.92,1935.16) 2933.93,1940 USB1.B6@2933.92,1973.75
  Bottom Layer w6.71: v1(2894.55,1935.16) v1(2933.92,1935.16)
VBUS: D16.1 D17.1 D18.1 S4.1 TP27.1 U8.4 U8.8 | length 1689.4
  Top Layer w24: S4.1@3725,1821.38 3725,1892.32 3739.06,1906.38 3877,1906.38 3901,1882.38 v2(3901,1824.38) 3901.76,1825.14 3931.76,1825.14 TP27.1@3933,1826.38 U8.4@4017.71,1826.38 ; D18.1@4297.25,1742.73 4297.63,1742.35 4297.63,1715.75 v2(4298,1715.38) ; v2(4348,1716.38) 4348.22,1716.6 4348.22,1742.5 D17.1@4348.44,1742.73
  Top Layer w32: 3877,1906.38 3877,1992.38 3907,2022.38 4176.94,2022.38 U8.8@4219.74,1979.58 ; D16.1@4078.74,1758.66 4079,1758.39 v2(4079,1730.38)
  Bottom Layer w32: S4.1@3725,1821.38 3725,1749.12 3743.74,1730.38 v2(4079,1730.38) 4283,1730.38 v2(4298,1715.38) 4347,1715.38 v2(4348,1716.38)
VCC1V1: C3.2 C66.2 C67.2 C68.2 C69.2 D10.1 L3.2 L9.1 R8.1 TP3.1 | length 1661.7
  Top Layer w24: v2(3473,2602.38) v2(3473,2566.38) TP3.1@3521,2566.38 ; L3.2@3522.07,2475.79 3522.53,2476.25 3522.53,2564.84 TP3.1@3521,2566.38 ; D10.1@3597.12,2571.38 3597.13,2568.16 3595.35,2566.38 TP3.1@3523,2566.38 TP3.1@3521,2566.38
  Bottom Layer w24: L9.1@2937.5,3384.68 2937.5,3417.32 2951.56,3431.38 3417,3431.38 3473,3375.38 v2(3473,2602.38) v2(3473,2566.38)
VCC1V1_RK628: C41.2 C42.2 L9.2 L10.1 U1.D8 U1.E9 | length 163
  Top Layer w9.84: U1.D8@2922.63,3276.97 v1(2935.43,3289.77) ; U1.E9@2948.23,3251.38 v1(2961.02,3264.18)
  Bottom Layer w16: L9.2@2937.5,3345.31 2936.63,3345.31 2936.5,3345.18 C42.2@2936.5,3313.74 2936.38,3313.61 2936.38,3290.71 v1(2935.43,3289.77) 2936.66,3288.54 2936.66,3264.87 2936.79,3264.74 C41.2@2938.5,3264.74 2938.63,3264.61 2960.58,3264.61 v1(2961.02,3264.18) 2968.92,3264.17 2976.17,3271.43 L10.1@2977.88,3271.43
VCC3V3: C1.2 C26.2 C27.2 C28.2 C54.2 C55.2 C56.2 C57.2 D8.1 L1.2 L7.1 P1.1 R1.1 R29.1 R30.1 R58.1 TP1.1 U4.3 | length 6037.3
  Top Layer w10: C28.2@2685.98,2384.41 C27.2@2725.98,2384.41 C26.2@2765.98,2384.41 2768.86,2387.28 2784.91,2387.28 2813.13,2415.51 U4.3@2828.62,2415.52
  Top Layer w16: v2(2630,2062.38) 2630,2330.14 2684.27,2384.41 C28.2@2685.72,2384.41 ; R58.1@3136.89,2314.3 v1(3161,2314.3) 3279.09,2314.29 3322,2271.38 v1(3322,2060.38)
  Top Layer w24: v2(1895,1951.38) 1941.69,1904.69 P1.1@1941.68,1803.86 ; C28.2@2685.72,2384.41 C28.2@2685.98,2384.41 ; v2(2816,2062.38) 2816,2063.46 2818,2065.46 2818,2140.56 R30.1@2819.13,2141.7 R29.1@2858.51,2141.7 ; L1.2@3894.6,2285.79 3895.01,2285.38 TP1.1@3984,2285.38 3984.25,2285.63 4058.34,2285.63 D8.1@4058.58,2285.88 ; C56.2@3919.13,2351.11 3919.41,2351.38 v2(3954,2351.38) v2(3982,2351.38)
  Bottom Layer w24: v2(1895,1951.38) 1895,2026.38 1931,2062.38 v2(2630,2062.38) 3320,2062.38 v1(3322,2060.38) 3894,2060.38 3982,2148.38 v2@3982,2350.3 ; L7.1@2722.18,3133.38 2639.06,3133.38 2625,3119.32 2625,2921.38 2668,2878.38 3353,2878.38 3414,2817.38 3414,2549.38 3447,2516.38 3529,2516.38 3555,2542.38 3946,2542.38 3982,2506.38 v2(3982,2351.38) v2(3954,2351.38)
VCC3V3_RK628: C37.2 C38.2 D7.1 L7.2 L8.1 U1.H5 | length 882.8
  Top Layer w9.84: v1(2833.07,3161.81) U1.H5@2845.86,3174.61
  Top Layer w10: v1(3095,3053.38) 3433.32,3053.38 D7.1@3471.5,3015.2
  Mid-Layer 2 w16: v1(2833.07,3161.81) 2833.07,3146.75 2842.44,3137.38 2895,3137.38 2931,3101.38 2931,3054.38 2948,3037.38 3079,3037.38 v1(3095,3053.38)
  Bottom Layer w16: L7.2@2761.55,3134.05 2793,3134.05 C37.2@2793.12,3134.18 C38.2@2833.12,3134.18 v1(2833.07,3161.81) v1(2833.07,3161.81) 2833.07,3177.93 2833.2,3178.05 L8.1@2833.5,3178.06
VCC5V: C4.2 C5.2 C6.2 C18.2 D1.2 D2.1 D13.1 L5.1 R12.1 R22.1 R25.2 R28.2 TP4.1 | length 2563.8
  Top Layer w10: D2.1@1632.6,2147.17 1632.6,2142.24 1659.46,2115.38 1777.64,2115.38 1800,2137.74 ; D13.1@1687.56,1841.38 1718,1841.38 1800,1923.38 1800,2137.74 ; 1807.01,2356.38 1807.01,2299.39 1781,2273.38 1781,2223.72 1798.03,2206.69 R22.1@1800,2206.7 v1(1800,2179.88) 1800,2137.74 ; v1(1879.38,2179.88) R12.1@1879.38,2206.7
  Top Layer w24: 1800,2137.74 1837.24,2137.74 v1(1879.38,2179.88) ; L5.1@1857.63,2858.03 1997.21,2858.03 ; R28.2@2023.17,2775.72 R28.2@2026.54,2775.72 ; TP4.1@2025,2931.38 2020.55,2926.93 2020.55,2881.37 1997.21,2858.03 ; R25.2@2039.68,2576.38 2234,2576.38 2246,2564.38 ; D1.2@2120,2471.38 2165.63,2471.38 C6.2@2170.63,2466.38 ; v2(2170,2368.38) 2170.63,2369.01 C4.2@2170.63,2386.38 C5.2@2170.63,2426.38 C6.2@2170.63,2466.38 ; 1997.21,2858.03 2026.73,2828.5 C18.2@2026.73,2824.95 2026.73,2775.91 R28.2@2026.54,2775.72 ; R28.2@2026.54,2775.72 R28.2@2026.73,2775.72 2166.66,2775.72 2246,2696.38 2246,2576.38 2246,2564.38 ; C6.2@2170.63,2466.38 2170.63,2489.01 2246,2564.38
  Bottom Layer w24: v1(1879.38,2179.88) 1879.38,2231.76 1905,2257.38 2146,2257.38 2170,2281.38 v2(2170,2368.38)
VCCA1V1_RK628: C33.2 C34.2 C35.2 C36.2 C43.2 C44.2 C50.2 C51.2 L10.2 U1.C5 U1.D4 U1.E3 U1.F3 U1.H9 U1.J7 U1.J9 | length 455.5
  Top Layer w8: U1.J9@2948.23,3149.02 v1(2961.02,3161.81) U1.H9@2948.23,3174.61
  Top Layer w9.84: U1.F3@2794.68,3225.79 v1(2781.89,3238.59) U1.E3@2794.68,3251.38 U1.D4@2820.27,3276.97 v1(2833.07,3289.77) U1.C5@2845.86,3302.56 ; U1.J7@2897.04,3149.02 v1(2909.84,3161.82)
  Bottom Layer w16: C51.2@2730.99,3232.99 2732.71,3232.98 2732.84,3233.11 2732.84,3246.11 2743.79,3257.05 C50.2@2745.5,3257.06 2747.22,3257.05 2763.19,3241.08 2779.39,3241.08 v1(2781.89,3238.59) ; C35.2@2824.5,3356.12 2824.5,3354.4 2824.82,3354.09 C36.2@2824.82,3316.74 ; C36.2@2824.95,3314.9 2833.07,3306.77 v1(2833.07,3289.77) ; C33.2@2882.5,3161.52 2909.54,3161.51 v1(2909.84,3161.82) v1@2910.15,3162.12 ; C34.2@2933.38,3162.12 C34.2@2933.5,3162.25 2960.59,3162.24 v1(2961.02,3161.81) ; v1(2961.02,3238.59) 2969.64,3238.58 2976.17,3232.05 L10.2@2977.88,3232.06 C43.2@3011.5,3232.06 3011.5,3269.39 3011.82,3269.71 C44.2@3011.82,3271.43
VCCA3V3_RK628: C30.2 C31.2 C32.2 C39.2 C40.2 C48.2 C49.2 L8.2 U1.C3 U1.D5 U1.E4 U1.J10 U1.M10 | length 1003.4
  Top Layer w9.84: v1(2781.89,3315.36) U1.C3@2794.68,3302.56 ; v1(2833.07,3264.18) U1.D5@2845.86,3276.97 ; U1.M10@2973.82,3072.25 v1(2986.61,3059.45) ; U1.J10@2973.82,3149.02 v1(2986.61,3136.22)
  Top Layer w10: U1.E4@2820.27,3251.38 v1(2833.07,3264.18)
  Mid-Layer 2 w16: 2807.48,3264.13 2807.53,3264.17 ; v1(2833.07,3264.18) 2807.53,3264.17 ; v1(2986.61,3059.45) 2987,3059.83 3003.45,3059.83 3017,3073.38 3017,3136.22 ; v1(2986.61,3136.22) 3017,3136.22 ; 2807.53,3264.17 2787.45,3264.17 2781.89,3269.74 v1(2781.89,3315.36) 2800.91,3334.38 2998,3334.38 3017,3315.38 3017,3136.22
  Bottom Layer w16: v1(2781.89,3315.36) 2781.89,3325.72 2795.19,3339.02 C49.2@2795.19,3340.74 C40.2@2795.19,3380.12 ; C31.2@2816.32,3265.61 C31.2@2816.44,3265.74 2816.44,3264.3 C31.2@2816.57,3264.17 ; L8.2@2833.5,3217.43 2802.53,3217.43 2801.93,3218.02 C39.2@2801.93,3219.74 2802.06,3219.87 2802.06,3229.06 2802.89,3229.89 2802.89,3250.47 C31.2@2816.57,3264.15 ; C48.2@2851.82,3265.02 2851.69,3264.9 2849.98,3264.9 2849.25,3264.17 v1(2833.07,3264.18) C31.2@2816.57,3264.17 ; v1(2986.61,3059.45) 3003.5,3059.45 3013.82,3069.77 C32.2@3013.82,3071.49 ; v1(2986.61,3136.22) 3005.58,3136.22 3011.79,3142.43 C30.2@3013.5,3142.43
VCCID/A: C23.2 C24.2 C25.2 L6.2 TP13.1 U4.1 U4.35 | length 928
  Top Layer w10: TP13.1@2670,2610.38 2670.34,2610.72 2729.66,2610.72 C24.2@2730,2611.07 2730.16,2610.91 2730.16,2571.22 C25.2@2730.31,2571.07 2730.32,2518.69 L6.2@2728,2516.38 ; 2798,2465.98 U4.1@2819.84,2444.13 ; U4.35@3019.56,2482.44 3019.57,2523.31 3030.98,2534.72 C23.2@3101.3,2534.73 3101.65,2535.07 3101.65,2557.03 v5(3102,2557.38)
  Top Layer w16: C24.2@2730,2611.07 v5(2730,2644.38)
  Top Layer w24: L6.2@2725.98,2515.67 2737.61,2504.05 2783.94,2504.05 2798,2489.99 2798,2465.98
  Bottom Layer w16: v5(2730,2644.38) 3088,2644.38 3102,2630.38 v5(3102,2557.38)
  other v5: 2797,2490.38
VCCIN: C7.2 C53.2 C58.2 C59.2 C60.2 C61.2 D16.2 L4.1 R3.1 R4.1 R5.1 R14.1 R20.1 R24.1 R63.1 S5.1 U2.7 U2.10 U2.19 U8.5 | length 5791.7
  Top Layer w10: v1(1617.63,2516.38) R20.1@1640.31,2516.38 ; 1870,2356.38 1870,2324.38 v2(1886,2308.38) 1919.18,2275.2 1947.64,2275.2 1958.14,2264.7 C7.2@1958.14,2246.07 ; v3@3653.3,2206.08 v3(3651,2208.38) 3651.22,2208.6 3651.22,2222.22 C58.2@3651.45,2222.45 3652.35,2222.45 3655.22,2225.32 3655.22,2237.6 3667.23,2249.61 U2.7@3667.23,2275.92 ; v3(3654.36,2464.95) 3654.25,2464.83 3654.25,2451.22 C60.2@3654.13,2451.11 C60.2@3656.1,2451.1 ; U2.19@3667.23,2388.12 3667.23,2439.97 C60.2@3656.1,2451.1 ; v3@3694.25,2464.83 3694.25,2451.22 C61.2@3694.13,2451.11 C60.2@3656.1,2451.1 ; U2.10@3714.48,2275.92 3714.48,2262.29 3729.39,2247.38 3756,2247.38 3765.95,2237.42 3765.95,2225.01 3768.83,2222.13 C59.2@3769.59,2222.14 3769.3,2221.84 3769.3,2208.67 v3(3769,2208.38) v3@3766.7,2206.08 ; R5.1@3732.16,2490.47 R5.1@3734.13,2490.48 v3(3734.13,2511.38)
  Top Layer w16: v1(2038.15,2355.08) 2038.16,2376.57 2038.28,2376.69 R14.1@2040,2376.7 ; R24.1@2039.68,2536.38 v1(2058,2536.38)
  Top Layer w24: v2(2120,2110.38) L4.1@2120,2162.37 ; v3(3690.83,2158.38) R4.1@3690.83,2183.08 ; R3.1@3730.21,2183.08 v3(3730.21,2158.38) 3730.21,2128.44 3744.27,2114.38 4003,2114.38 4063.23,2174.61 S5.1@4332.63,2174.61 ; R63.1@4029.59,1772.43 4050.54,1793.38 v2(4106,1793.38) v2(4136.53,1793.38) 4163.57,1766.34 D16.2@4163.57,1758.84 ; D16.2@4171.26,1758.66 4171.45,1758.84 4201.46,1758.84 4218.37,1775.75 C53.2@4235,1775.75 4235,1825.64 4234.27,1826.38 U8.5@4232.28,1826.38
  Bottom Layer w24: v1(1617.63,2516.38) 1641,2516.38 1663,2494.38 1663,2308.38 ; v1(2058,2536.38) 2058,2535.84 2038.16,2515.99 v1(2038.15,2355.08) 1991.46,2308.38 v2(1886,2308.38) 1663,2308.38 ; v3(3734.13,2511.38) 3734.13,2504.72 v3(3694.36,2464.95) v3(3654.36,2464.95) 3637,2447.59 3637,2224 3651,2210 v3(3651,2208.38) 3690.83,2168.55 v3(3690.83,2158.38) ; v3(3769,2208.38) 3730.21,2169.59 v3(3730.21,2158.38) v3(3690.83,2158.38) ; v2(4106,1793.38) v2(4136.53,1793.38) 4137.3,1794.14 4199.03,1794.14 ; 1663,2308.38 1663,2154.38 1707,2110.38 v2(2120,2110.38) 3654,2110.38 3690.83,2147.21 v3(3690.83,2158.38)
  Bottom Layer w32: 4199.03,1794.14 4230,1825.11 4230,2146.38 4250.79,2167.17 4325.2,2167.17 S5.1@4332.63,2174.61
VSW: L6.1 TP12.1 U4.2 | length 218.5
  Top Layer w10: 2790,2429.38 2790.09,2429.29 U4.2@2828.62,2429.3
  Top Layer w24: TP12.1@2615,2431.38 2616.67,2433.05 2724.31,2433.05 L6.1@2725.82,2434.56 ; L6.1@2725,2435.38 L6.1@2725.82,2434.56 ; L6.1@2725.98,2434.73 L6.1@2725.82,2434.56 ; 2790,2429.38 2731,2429.38 L6.1@2725.82,2434.56
XTALI: U4.32 | length 111
  Top Layer w6: U4.32@3031.38,2415.52 3065.77,2415.51 3080.98,2430.72 3080.98,2441.5 3091.45,2451.97 3120.98,2451.97
XTALO: TP11.1 U4.31 | length 219.7
  Top Layer w6: U4.31@3031.38,2401.74 3058.98,2401.73 3070.98,2389.72 3070.98,2369.72 3083.23,2357.48 3120.99,2357.48 ; 3135.98,2359.72 TP11.1@3235.98,2359.73
pads on no net: J1.14 J2.4 J2.7 J2.31 J2.33 J2.39 P1.5 P1.6 S1.3 S1.4 S1.5 S2. S2.s S4.3 S4.4 S4.5 S5.3 S5.4 S5.5 U1.A2 U1.A3 U1.A4 U1.A5 U1.A6 U1.A7 U1.A8 U1.A9 U1.A10 U1.A11 U1.B2 U1.B3 U1.B4 U1.B5 U1.B6 U1.B7 U1.B8 U1.B9 U1.B10 U1.B11 U1.B12 U1.C8 U1.C9 U1.C10 U1.C11 U1.C12 U1.D9 U1.D10 U1.D11 U1.D12 U1.E8 U1.E10 U1.E11 U1.E12 U1.F8 U1.F9 U1.F10 U1.F11 U1.F12 U1.G10 U1.G11 U1.G12 U1.H1 U1.H2 U1.H3 U1.H7 U1.H8 U1.J1 U1.J2 U1.J4 U1.J5 U1.J6 U1.K1 U1.K2 U1.K4 U1.L1 U1.L2 U1.L4 U1.L5 U1.L6 U1.L7 U1.M2 U1.M3 U1.M4 U1.M5 U1.M6 U1.M7 U2.16 U4.4 U4.5 U4.6 U4.7 U4.8 U4.9 U4.22 U4.26 U4.27 U4.28 U4.29 U4.30 U4.34 U4.36 U4.37 U4.39 U4.40 U4.41 U4.42 U4.47 U4.48 USB1. USB1.A8 USB1.B8
copper on no net: | length 0

## Polygon pours and split planes (outlines as drawn)
LCD_BL- on Bottom Layer (solid): 1714.5,2534.88 1714.5,2613.88 1746,2645.38 1941,2645.38 1950,2636.38 1950,2605.38 1770,2605.38 1763,2598.38 1763,2522.38 1760,2519.38 1730,2519.38
GND on Mid-Layer 1 (solid): 1505,3708.62 4457.75,3708.62 4457.75,1661.38 1505,1661.38
NETL1_1 on Top Layer (solid): 3723,2293.38 3731,2285.38 3778,2285.38 3784,2279.38 3784,2244.38 3790,2238.38 3837,2238.38 3841,2242.38 3841,2325.38 3837,2329.38 3797,2329.38 3786,2329.38 3784,2327.38 3784,2311.38 3777,2304.38 3771,2304.38 3721,2304.38 3721,2295.38
VCC3V3 on Top Layer (solid): 3929,2359.38 3929,2212.38 3865,2212.38 3865,2338.38 3790,2338.38 3790,2359.38
NETL3_1 on Top Layer (solid): 3628,2520.38 3580,2520.38 3576,2516.38 3576,2430.38 3594,2412.38 3629,2412.38 3644,2397.38 3644,2376.38 3648,2372.38 3656,2372.38 3656,2419.38 3634,2441.38 3634,2514.38
VCC1V1 on Top Layer (solid): 3492,2387.38 3502,2397.38 3568,2397.38 3576,2405.38 3576,2420.38 3552,2444.38 3552,2519.38 3545,2526.38 3470,2526.38 3468,2524.38 3468,2346.38 3475,2339.38 3492,2338.38
NETL2_1 on Top Layer (solid): 3628,2225.38 3628,2145.38 3624,2141.38 3580,2141.38 3575,2146.38 3575,2249.38 3584,2258.38 3619,2258.38 3626,2265.38 3626,2287.38 3632,2293.38 3655,2293.38 3655,2252.38
LCD_1V8 on Top Layer (solid): 3499,2272.38 3508,2263.38 3560,2263.38 3568,2255.38 3568,2144.38 3565,2141.38 3473,2141.38 3465,2149.38 3465,2319.38 3470,2324.38 3489,2324.38 3499,2314.38
LCD_BL- on Top Layer (solid): 1749,2556.38 1729,2556.38 1717,2544.38 1717,2525.83 1739.46,2503.38 1793,2503.38 1793,2543.38 1762,2543.38
LCD_BL- on Top Layer (solid): 1888,2646.38 1939,2646.38 1949,2634.95 1949,2545.38 1923,2519.38 1884,2519.38 1884,2576.38 1880,2580.38 1866,2580.38 1866,2624.38
VCCA1V1_RK628 on Mid-Layer 2 (solid): 2765.52,3204.86 2768,3202.38 2866,3202.38 2876,3192.38 2876,3161.38 2884,3153.38 2970,3153.38 2976,3159.38 2976,3244.38 2969,3251.38 2909,3251.38 2902,3258.38 2902,3309.38 2890,3321.38 2825,3321.38 2820,3316.38 2820,3285.38 2824,3281.38 2860,3281.38 2869,3272.38 2869,3228.38 2864,3223.38 2805,3223.38 2795,3233.38 2795,3245.38 2791,3249.38 2771.41,3249.38 2765.52,3243.49
GND on Mid-Layer 2 (solid): 1505,3708.62 4457.75,3708.62 4457.75,1661.38 1505,1661.38

## Keep-outs
Keep-Out Layer:
  lines w10: 1505,1700.75 ccw(c1544.37,1700.75) 1544.37,1661.38 ; 1505,3669.25 cw(c1544.37,3669.25) 1544.37,3708.62 ; 4418.39,1661.38 ccw(c4418.39,1700.75) 4457.76,1700.75 ; 4418.39,3708.62 cw(c4418.39,3669.25) 4457.76,3669.25

## Silkscreen, mask and mechanical layers (free items; w line width, h text height)
Mechanical 1:
  lines w3.94: 1505,1661.38 1505,1681.38
  lines w10: 1505,1700.75 ccw(c1544.37,1700.75) 1544.37,1661.38 4418.39,1661.38 ccw(c4418.38,1700.75) 4457.75,1700.75 4457.76,3669.25 ccw(c4418.39,3669.25) 4418.39,3708.62 1544.37,3708.62 ccw(c1544.37,3669.25) 1505,3669.25 1505,1700.75
Document:
  lines w10: 1505,1700.75 1505,3669.25 cw(c1544.37,3669.25) 1544.37,3708.62 4418.39,3708.62 cw(c4418.39,3669.25) 4457.76,3669.25 4457.76,1700.75 cw(c4418.38,1700.75) 4418.39,1661.38 1544.37,1661.38 cw(c1544.37,1700.75) 1505,1700.75